# Altium PCB Receiver_1n5819.PcbDoc
Units mil, origin at the board's own origin, x right, y up, seen from the top; angles counter-clockwise.
Board outline 2355 x 1270 mil, 2 copper layers (Top Layer, Bottom Layer); 23 components, 11 nets, 53 pads, 0 vias.
Unrouted connection lines stored in the file: 1.
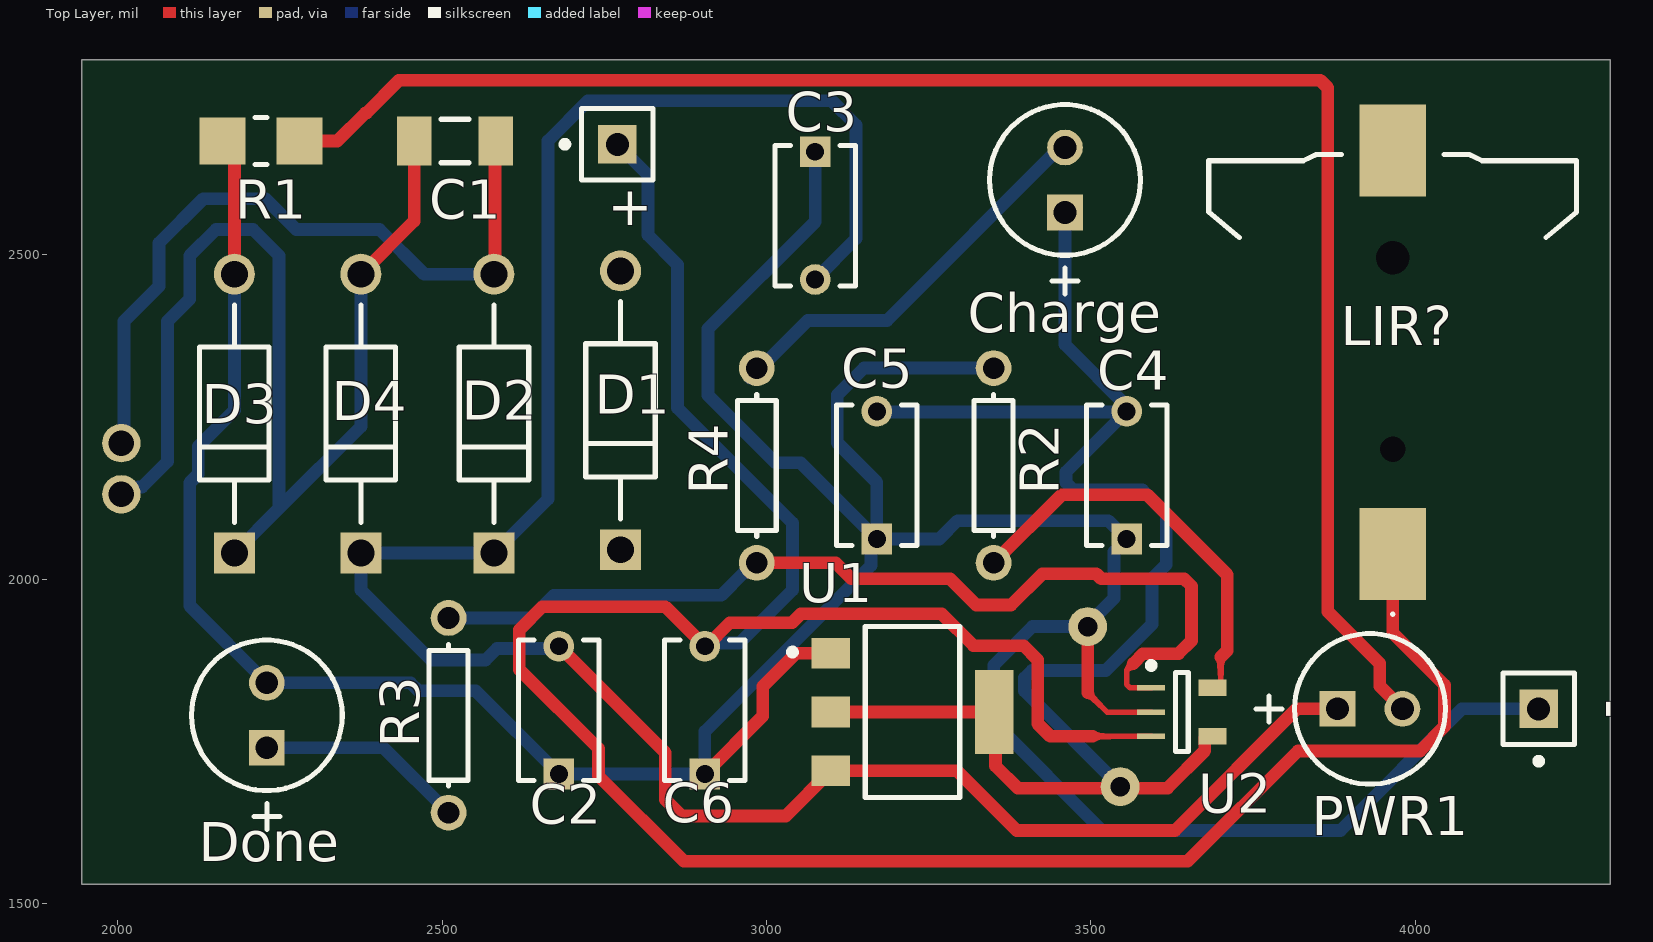
[diagram p0: Top Layer view]
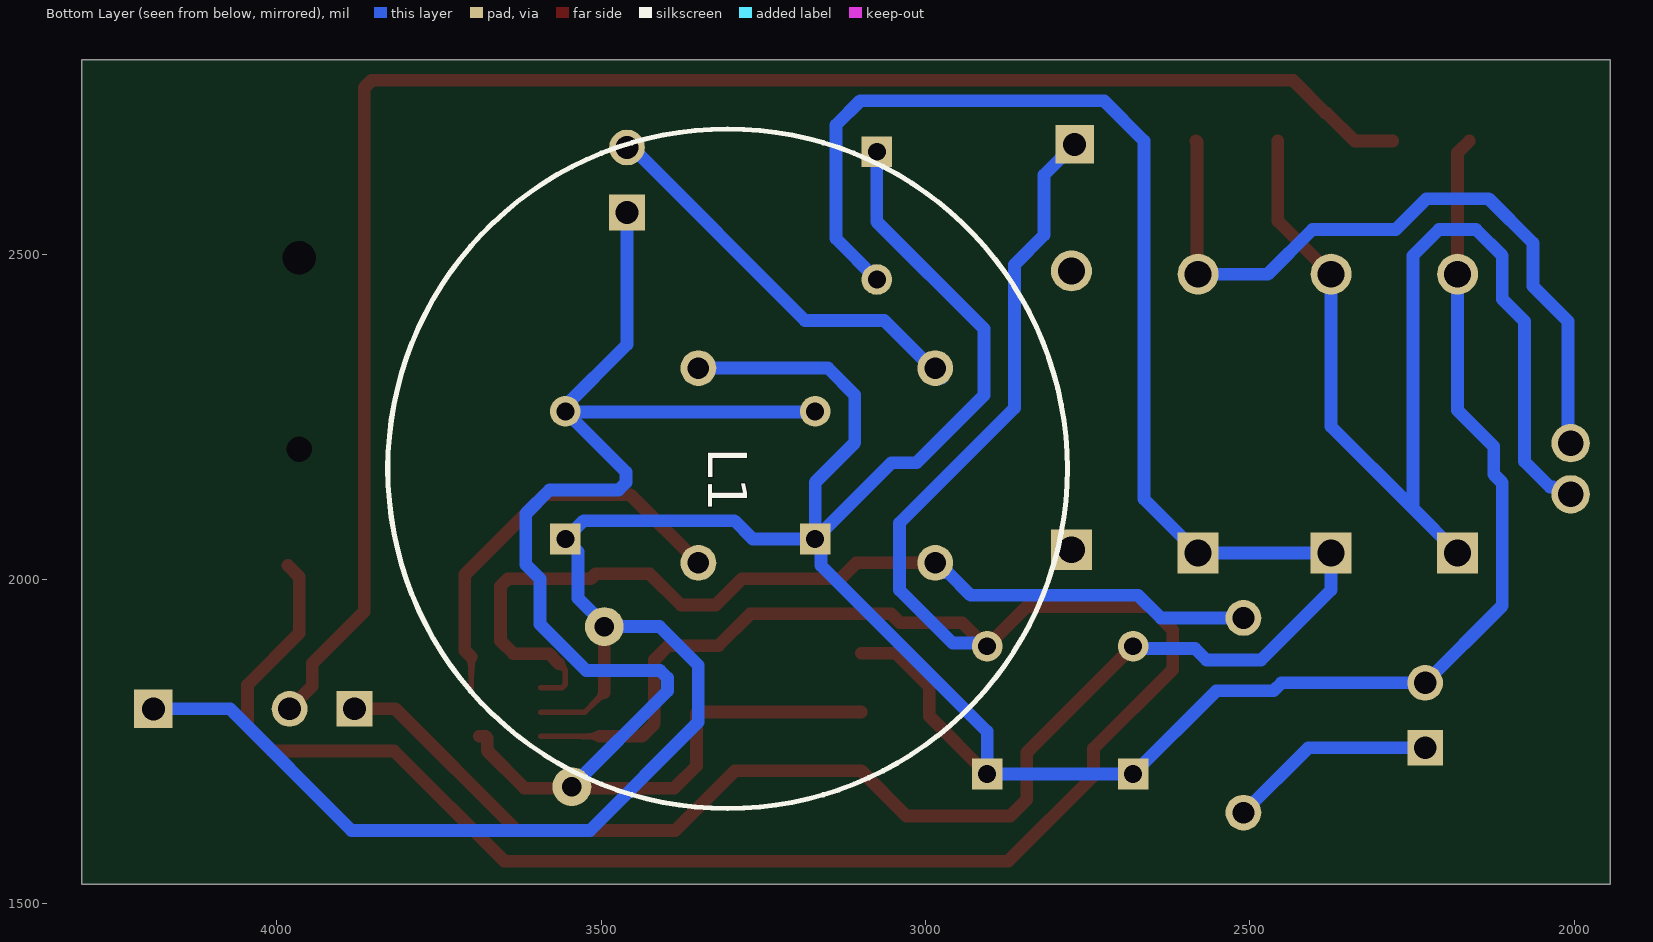
[diagram p1: Bottom Layer view, seen from below]
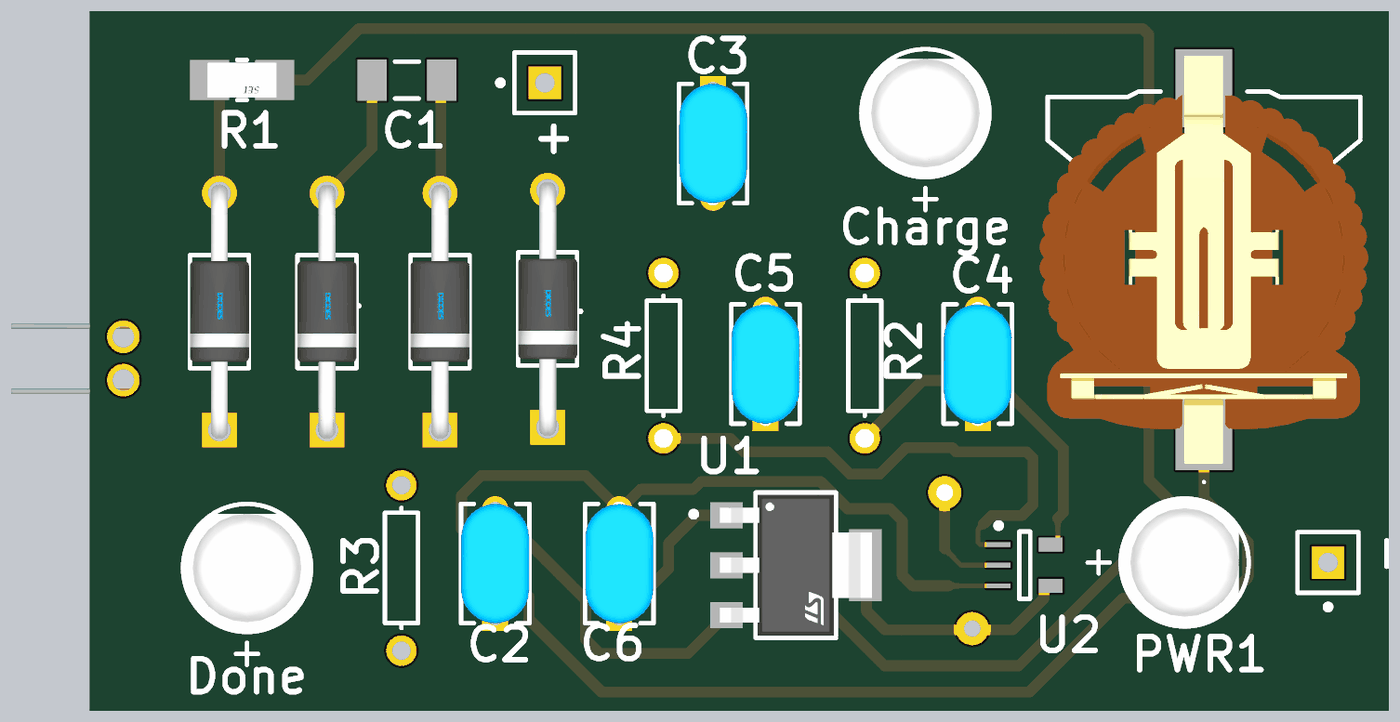
[diagram p2: 3D render of the assembled board from above, using the file's embedded part models]

## Layer stack, top to bottom
Top Solder: solder mask 0.4, Solder Resist, Dk 3.5
Top Layer: signal copper 1.4
Dielectric 1: dielectric 12.6, FR-4, Dk 4.8
Bottom Layer: signal copper 1.4
Bottom Solder: solder mask 0.4, Solder Resist, Dk 3.5

## Board outline
1945,1530 4300,1530 4300,2800 1945,2800

## Design rules (kind name [scope] priority, off if disabled: settings)
Clearance [All] p1: gap=27.56 ignorepadtopadclearanceinfootprint=FALSE
PolygonConnect [All] p1: connectstyle=Relief reliefconductorwidth=10 reliefentries=4 polygonreliefangle="90 Angle" airgapwidth=10
RoutingVias [All] p1: holewidth=28 width=50 viastyle="Through Hole" minholewidth=28 minwidth=50 maxholewidth=28 maxwidth=50
SolderMaskExpansion [All] p1: expansion=4 istentingtop=FALSE
SupplyNets "Schematic Supply Nets" [InNet('GND')] p1: voltage=0.000
Width [All] p1: maxlimit=19.68 minlimit=8.66 preferedwidth=19.68 bottomlayer_minwidth=19.68 minimp=50.000000 maximp=50.000000 favimp=50.000000
30 further rules are at their usual default settings.

## Components (designator, comment, footprint, x,y, rotation, side; value= is the part's Value field where it differs from the comment)
+ "Antenna" PIN1 2770,2670 r90 top
- "Antenna" PIN1 4190,1800 r180 top
C1 "330nF" CAPC1206(3216)170_M 2520,2675 r180 top value=6.8nF
C2 "10nF" FP-RDE2M1-MFG 2680,1797.99 r90 top
C3 "1uF" FP-RDE2M1-MFG 3075,2560 r270 top
C4 "4u7" FP-RDE2M1-MFG 3555,2160 r90 top
C5 "4u7" FP-RDE2M1-MFG 3170,2160 r90 top
C6 "10uF" FP-RDE2M1-MFG 2905,1797.99 r90 top
Charge "WP7113SGD" KING-WP7113SGD_V 3460,2615 r90 top
D1 "1N5819-T" FP-DO-41_Plastic-MFG 2775,2260 r90 top value="110 pF"
D2 "1N5819-T" FP-DO-41_Plastic-MFG 2580,2255 r90 top value="110 pF"
D3 "1N5819-T" FP-DO-41_Plastic-MFG 2180,2255 r90 top value="110 pF"
D4 "1N5819-T" FP-DO-41_Plastic-MFG 2375,2255 r90 top value="110 pF"
Done "WP7113SGD" KING-WP7113SGD_V 2230,1790 r90 top
L1 "760308101303" 760308101303 3305,2170 r270 bottom
LIR? "1056" 1056 3965,2349.33 r90 top
PWR1 "WP7113SGD" KING-WP7113SGD_V 3930,1800 r0 top
R1 "1K" FP-HCJ1206-MFG 2220.94,2675 r180 top
R2 "" AXIAL-0.3 3350,2175 r270 top value=51K
R3 "" AXIAL-0.3 2510,1790 r90 top value=1K
R4 "" AXIAL-0.3 2985,2175 r270 top value=1K
U1 "LDL1117S50R" FP-SOT-223-0046067_14-MFG 3225,1795 r0 top
U2 "MCP73831T-4ADI/OT" SOT-23-OT5_N 3640,1795 r0 top

## Footprints (in the part's own frame and the unit in brackets; to place one, negate y for a bottom-side part, rotate by r counter-clockwise, add the part's x,y. Pads: shape width x height; smd on the part's side, far side on the other; paste and mask are expansions set on the pad)
1056 [mm]
  round 0.5 hole 1 unplated: 1(-3.8,0)
  round 0.65 hole 1.3 unplated: 2(3.7,0)
  rect 3.6x2.6 smd: C1(-7.9,0) C2(7.9,0)
  silkscreen extent -10.3,-7.2 7.75,7.2, body extent -9.4,-7.57 9.4,7.57, height 4.32
760308101303 [mm] "Wireless Power Transfer Receiver Coil,  Dia 26mm"
  round 1.5 hole 1: 1(1,33) 2(-1,33)
  silkscreen extent -13.3,-13.3 13.3,13.3, body extent -13.15,-13.15 13.15,38.15, height 1.64
AXIAL-0.3 [mm] "Axial Device, Thru-Hole; 2 Leads; 0.3 in Pin Spacing"
  round 1.4 hole 0.85: 1(-3.81,0) 2(3.81,0)
  silkscreen extent -2.77,-0.76 2.77,0.76
CAPC1206(3216)170_M [mm] "Chip Capacitor, Body 3.2x1.6mm, Height 1.7mm, IPC Low Density"
  rect 1.35x1.9 smd: 1(-1.6,0) 2(1.6,0)
  silkscreen extent -0.55,-0.85 0.55,0.85, body extent -1.7,-0.9 1.7,0.9, height 1.7
FP-DO-41_Plastic-MFG [mm]
  rect 1.6x1.6 hole 1.05 paste-2539.97 mask+0: 1(-5.456,0)
  round 1.6 hole 1.05 paste-2539.97 mask+0: 2(5.456,0)
  silkscreen extent -4.26,-1.36 4.26,1.36, body extent -6.36,-1.46 6.36,1.46, height 0.25
FP-HCJ1206-MFG [mm]
  rect 1.8x1.84 smd paste+0 mask+0: 1(-1.5,0) 2(1.5,0)
  silkscreen extent -0.23,-0.92 0.23,0.92, body extent -2.5,-1.02 2.5,1.02, height 0.25
FP-RDE2M1-MFG [mm]
  rect 1.2x1.2 hole 0.7 paste-2539.97 mask+0: 1(-2.5,0)
  round 1.2 hole 0.7 paste-2539.97 mask+0: 2(2.5,0)
  silkscreen extent -2.75,-1.58 2.75,1.58, body extent -3.2,-1.68 3.2,1.68, height 0.25
FP-SOT-223-0046067_14-MFG [mm]
  rect 1.5x1.2 smd paste+0 mask+0: 1(-3.2,2.3) 2(-3.2,0) 3(-3.2,-2.3)
  rect 1.5x3.3 smd paste+0 mask+0: 4(3.2,0)
  silkscreen extent -4.82,-3.35 1.85,3.35, body extent -4.05,-3.45 4.05,3.45, height 0.25
KING-WP7113SGD_V [mm] "THD, 2-Leads, Dia 5.9mm, Body Length 8.6mm"
  rect 1.4x1.4 hole 0.889: 1(-1.27,0)
  round 1.4 hole 0.889: 2(1.27,0)
  silkscreen extent -4.47,-2.95 2.95,2.95, body extent -2.95,-2.95 2.5,2.95, height 15.5
PIN1 [mm] "Generic Antenna; 1 Lead"
  rect 1.5x1.5 hole 0.9: 1(0,0)
  silkscreen extent -1.4,-1.4 1.4,2.17
SOT-23-OT5_N [mm] "SOT23, 5-Leads, Body 2.9x1.7mm, Pitch 0.95mm, Lead Span 2.8mm, IPC Medium Density"
  rect 1.1x0.22 smd: 1(-1.2,0.95) 2(-1.2,0) 3(-1.2,-0.95)
  rect 1.1x0.65 smd: 4(1.2,-0.95)
  rect 1.1x0.635 smd: 5(1.2,0.95)
  silkscreen extent -1.32,-1.55 0.25,1.95, body extent -0.9,-1.55 0.9,1.55, height 1.45

## Part data
+ -: "Generic Antenna", LatestRevisionDate=17-Jul-2002, LatestRevisionNote="Re-released for DXP Platform.", PackageReference=PIN1, Published=24-Mar-1999, Publisher="Altium Limited"
C1: library part CMP-1037-03299-1, "CAP 6.8nF 50V ±10% 1206 (3216 Metric) Thickness 1.7mm SMD", Case-EIA=1206, Case-Metric=3216, Rated Voltage="50 V", Tolerance=Â±10%, Max Thickness="1.7 mm", Technology=SMT
C2: library part CMP-06035-028300-1, "Ceramic Capacitor 10nF ±10% 630V X7R Radial", Case/Package=Radial, Dielectric=X7R, Max Operating Temperature=125°C, Min Operating Temperature=-55°C, Package Quantity=2000, Resistor Type=Ceramic, Tolerance=10%, Voltage Rating=630V, Capacitance=10nF, Height=4mm, Height - Seated (Max)=0.236inch, Lead Diameter=0.5mm, Lead Free="Lead Free", Lead Pitch=0.197inch, Lead/Base Style="Formed Leads", Length=0.217inch, Mount="Through Hole", Packaging="Tape and Reel", Termination=Radial, Voltage Rating (DC)=630V, Width=4mm
C3 C4 C5 C6: library part CMP-06035-028300-1, "Ceramic Capacitor 10nF ±10% 630V X7R Radial", Capacitance=10nF, Case/Package=Radial, Dielectric=X7R, Max Operating Temperature=125°C, Min Operating Temperature=-55°C, Package Quantity=2000, Resistor Type=Ceramic, Tolerance=10%, Voltage Rating=630V, Height=4mm, Height - Seated (Max)=0.236inch, Lead Diameter=0.5mm, Lead Free="Lead Free", Lead Pitch=0.197inch, Lead/Base Style="Formed Leads", Length=0.217inch, Mount="Through Hole", Packaging="Tape and Reel", Termination=Radial, Voltage Rating (DC)=630V, Width=4mm
Charge Done PWR1: library part CMP-2100-03698-1, "LED Green, 62.5 mW, 25 mA, -40 to 85 degC, 2-Pin THD, RoHS, Bulk", Case/Package=Radial, Colour=Green, Forward Voltage=2.2V, Manufacturer=Kingbright, Package Description="2-Pin Through Hole Device, Dia 5.9 mm, Body Length 8.6 mm", Package Quantity=1000, Test Current=20mA, Datasheet URL=http://www.kingbrightusa.com/images/catalog/SPEC/WP7113SGD.pdf, Datasheet Version="Rev. 6B, 01/2015", Dominant Wavelength=568nm, Height=8.6mm, Illumination Colour=Green, Lead Free=LeadFree, Lens Style=Tinted, Luminous Intensity=40mcd, Package Reference=WP7113SGD, Packaging=Bulk, RoHSCompliant=true, Viewing Angle=30degrees, Wavelength=568nm
D1 D2 D3 D4: library part CMP-12790-000042-1, "DIODE SCHOTTKY 40V 1A DO41", Capacitance="110 pF", Forward Current=1A, Manufacturer="Diodes Inc.", Max Junction Temp=+125°C, Max Repetitive Reverse Voltage=40V, Max Surge Forward Current=25A, Package="DO-41 (Plastic)", Peak Reverse Current=1mA, Temperature="-65°C to +125°C", Temperature Range Low=-65°C, Automotive=No, Category=Diode, ComponentLink2Description=Datasheet, ComponentLink2URL=https://www.diodes.com/assets/Datasheets/ds23001.pdf, Device Class L1="Discrete Semiconductors", Device Class L2=Diodes, Device Class L3="Schottky Diodes", Digikey Description="DIODE SCHOTTKY 40V 1A DO41", Footprint Url=https://www.diodes.com/assets/Package-Files/DO-41-Plastic.pdf, Height=2.72mm, Ipc Land Pattern Name=DIOPA1091W105L521D272, Lead Free=Yes, Manufacturer Part Number=1N5819-T, Mouser Description="Schottky Diodes & Rectifiers Vr/40V Io/1A T/R", Octopart=https://octopart.com/1n5819-t-diodes+inc.-55389586, Reverse Voltage=40V, RoHS=TRUE, Temperature Range High=+125°C
L1: library part CMP-03913-52738428-3, "WE-WPCC Wireless Power Charging Coil", Current Rating=1.5A, DC Resistance (DCR)=460mΩ, Inductance=47µH, Inductance Tolerance=10%, Max Operating Temperature=105°C, Min Operating Temperature=-20°C, Resistance=500mΩ, Saturation Current=3A, Self Resonant Frequency=8MHz, Diameter=26.3mm, Height=1.3mm, Length=25mm, Logic Function=Receiver, Number of Pins=2, Q Factor=25, REACH SVHC=Unknown, RoHS=Compliant, Tolerance=10%, Width=25mm
LIR?: "Hardware", Manufacturer_Name="Keystone Electronics", Mouser Part Number=534-1056, Datasheet Link=https://www.keyelco.com/product.cfm/product_id/715, Height=4.24mm, Manufacturer_Part_Number=1056, Mouser Price/Stock=https://www.mouser.co.uk/ProductDetail/Keystone-Electronics/1056?qs=sZfk%252BfAlGe4w00bCJntjFg%3D%3D
R1: library part CMP-26527-002752-1, "RES 0 OHM JUMPER 3/4W 1206", Case Code (Imperial)=1206, Case Code (Metric)=3216, Max Operating Temperature=155°C, Min Operating Temperature=-55°C, Package Quantity=5000, Resistance=0mR, Case/Package=1206, Features="Automotive AEC-Q200", Height=0.026inch, Length=0.122inch, Mount="Surface Mount", Number of Terminations=2, Packaging="Tape and Reel", Radiation Hardening=No, RoHS Compliant=Yes, Termination=Wraparound, Width=0.061inch
R2 R3 R4: library part Res1, "Resistor", LatestRevisionDate=17-Jul-2002, LatestRevisionNote="Re-released for DXP Platform.", PackageDescription="Axial Device, Thru-Hole; 2 Leads; 0.3 in Pin Spacing", PackageReference=AXIAL-0.3, Published=8-Jun-2000, Publisher="Altium Limited"
U1: library part CMP-12153-000005-1, "IC REG LINEAR 5V 1.2A SOT223", Dropout Voltage=350mV, Manufacturer=STMicroelectronics, Max Junction Temp=+150°C, Max Supply Voltage=18V, Min Supply Voltage=2.6V, Nominal Supply Current=250uA, Output Current=2A, Output Voltage=5V, Package=SOT-223-0046067_14, Temperature="-40°C to +125°C", Temperature Range High=+125°C, Temperature Range Low=-40°C, Accuracy Percentage=2%, Automotive=No, Category=IC, ComponentLink2Description=Datasheet, ComponentLink2URL=https://www.st.com/content/ccc/resource/technical/document/datasheet/group3/0e/5a/00/ca/10/1a/4f/a5/DM00366442/files/DM00366442.pdf/jcr:content/translations/en.DM00366442.pdf, Device Class L1="Integrated Circuits (ICs)", Device Class L2="Power Management ICs", Device Class L3="Voltage Regulators - Linear", Digikey Description="IC REG LINEAR 5V 1.2A SOT223", Height=1.9mm, Lead Free=Yes, Manufacturer Part Number=LDL1117S50R, Mouser Description="LDL1117 Series 1.2 A 5 V High PSRR LDO Linear Voltage Regulator - SOT-223", Number Of Outputs=1, Octopart=https://octopart.com/ldl1117s50r-stmicroelectronics-81876164, Output Type=Fixed, RoHS=TRUE, Standoff Height=0.02mm
U2: library part CMP-0133-00137-1, "Miniature Single-Cell, Fully Integrated Li-Ion, Li-Polymer Charge Management Controller, 4.4V, 5-Pin SOT-23, Industrial Temperature, Tape and Reel", Code_IPC=SOT23-5, DatasheetVersion="revE, Sep-2008", PackageDescription="5-Lead Plastic Small Outline Transistor (OT) [SOT-23]", PackageReference=SOT-23-OT5, PackageVersion="revBB, Aug-2009"

## Free pads (board coordinates)
  round 60 hole 30: 2(3545,1680) 4(3495,1926.66)

## Nets (pads, with @x,y where several pads share a name; then routed paths per layer and width w, separated by ;. In a path a pad name is that pad's centre, name@x,y a point inside that pad or via, vN(x,y) a via of type N, cw(c..) or ccw(c..) an arc to the next point about the centre after c; other vN are vias at no path point)
GND: -.1 C2.1 C3.1 C4.1 C5.1 C6.1 D3.2 Done.2 LIR?.C2 pad.4 R1.2 R2.1 U1.1 U2.2 | length 5747.5
  Top Layer w8.66: 3495,1825 3525,1795 U2.2
  Top Layer w19.68: R1.2 2180,2656.89 D3.2 ; C6.1 2994.26,1788.83 2994.26,1834.26 3045.55,1885.55 U1.1 ; 3495,1825 pad.4
  Bottom Layer w19.68: D3.2 2180,2260.1 2124.17,2204.27 2124.17,2161.45 2111.1,2148.38 2111.1,1958.9 Done.2 2451.32,1840 2463.52,1827.8 2551.77,1827.8 C2.1 C6.1 2905,1765 3160.97,2020.97 3160.97,2052.55 C5.1 ; C3.1 3075,2550.66 2910.04,2385.7 2910.04,2283.09 3013.91,2179.22 3052.35,2179.22 C5.1 ; R2.1 3150.27,2325 3108.98,2283.7 3108.98,2210.04 3170,2149.02 C5.1 ; -.1 4071.87,1800 3884.47,1612.6 3517.08,1612.6 3350.35,1779.33 3350.35,1867.3 3409.72,1926.66 pad.4 3495,1929.94 3535.45,1970.39 3535.45,2042.03 C4.1 3526.61,2089.96 3294.54,2089.96 3266.15,2061.57 C5.1
Net+_1: +.1 C6.2 LIR?.C1 U2.3 | length 4148.6
  Top Layer w8.66: 3502.21,1757.6 U2.3
  Top Layer w19.68: 3502.21,1757.6 3437.21,1757.6 3417.91,1776.89 3417.91,1875.45 3396,1897.36 3318.96,1897.36 3269.74,1946.57 3053.33,1946.57 3039.55,1932.8 2943.79,1932.8 2907.41,1896.42 C6.2 2843.98,1957.44 2654.72,1957.44 2618.98,1921.69 2618.98,1860.73 2741.02,1738.68 2741.02,1696.59 2872.62,1565 3648.8,1565 3818.84,1735.04 4006.91,1735.04 4044.96,1773.09 4044.96,1836.85 3965,1916.81 3965,2003.22 LIR?.C1@3982.53,2020.75
  Bottom Layer w19.68: +.1 2817.24,2622.76 2817.24,2530 2862.8,2484.45 2862.8,2263.52 3039.96,2086.36 3039.96,1983.09 2958.15,1901.28 2909.86,1901.28 C6.2
NetC1_1: C1.1 D2.2 L1.2 | length 1130.3
  Top Layer w19.68: D2.2 2581.5,2471.31 2581.5,2673.5 C1.1
  Bottom Layer w19.68: L1.2@2010,2208.74 2010,2397.25 2063.86,2451.11 2063.86,2517.92 2131.89,2585.95 2228.11,2585.95 2275.35,2538.71 2403.54,2538.71 2472.44,2469.81 D2.2
NetC1_2: C1.2 D3.1 D4.2 L1.1 | length 1729.6
  Top Layer w19.68: D4.2 2457.01,2551.82 C1.2
  Bottom Layer w19.68: L1.1@2010,2130 2020.65,2130 2032.46,2141.81 2037.72,2141.81 2076.93,2181.02 2076.93,2397.36 2111.1,2431.54 2111.1,2498.35 2151.46,2538.71 2208.54,2538.71 2248.9,2498.35 2248.9,2109.09 ; D3.1 2248.9,2109.09 ; D4.2 2375,2235.19 2248.9,2109.09
NetC2_2: C2.2 C3.2 D2.1 D4.1 PWR1.1 U1.3 | length 3564.9
  Top Layer w19.68: C2.2 2843.98,1732.44 2843.98,1660.45 2869.43,1635 3029.57,1635 U1.3 3293.74,1704.45 3385.59,1612.6 3629.59,1612.6 3816.99,1800 PWR1.1
  Bottom Layer w19.68: C2.2 2676.34,1892.76 2584.85,1892.76 2567.13,1875.04 2483.09,1875.04 2375,1983.13 D4.1 D2.1 2663.32,2123.51 2663.32,2675.27 2724.98,2736.93 3100.57,2736.93 3137.99,2699.51 3137.99,2524.57 C3.2
NetC4_2: C4.2 C5.2 Charge.1 pad.2 U1.2 U1.4 U2.4 | length 2418.1
  Top Layer w19.68: U1.2 U1.4 3352.96,1793.03 3352.96,1712.04 3387.24,1677.76 3545,1677.76 3617.76,1677.76 3675.43,1735.43 3675.43,1754.64 3678.39,1757.6 U2.4
  Bottom Layer w19.68: C5.2 3171,2257.42 C4.2@3554,2257.42 ; Charge.1 3460,2361.42 C4.2@3559,2262.42 ; pad.2 3397.6,1827.4 3397.6,1847.73 3409.13,1859.26 3522.92,1859.26 3594.11,1930.45 3594.11,2000.55 3616.02,2022.46 3616.02,2100.69 3579.51,2137.2 3473.15,2137.2 3461.62,2148.74 3461.62,2165.04 C4.2@3554,2257.42 ; C4.2 C4.2@3554,2257.42
NetCharge_2: Charge.2 R4.1 | length 632
  Bottom Layer w19.68: R4.1@2975,2310 3063.58,2398.58 3185.57,2398.58 3451.99,2665 Charge.2
NetDone_1: Done.1 R3.1 | length 321.4
  Bottom Layer w19.68: Done.1 2410,1740 R3.1
NetPWR1_2: PWR1.2 R1.1 | length 2633.3
  Top Layer w19.68: R1.1 2338.59,2675 2381.89,2718.3 2383.44,2718.3 2433.76,2768.62 3853.47,2768.62 3865,2757.09 3865,1950 3944.96,1870.04 3944.96,1835.04 PWR1.2
NetR2_2: R2.2 U2.5 | length 633
  Top Layer w8.66: U2.5@3700,1832.38 3700,1880
  Top Layer w19.68: R2.2 3455,2130 3586.71,2130 3710,2006.71 3710,1890 3700,1880
NetR3_2: R3.2 R4.2 U2.1 | length 1499.6
  Top Layer w8.66: 3565.32,1870 3555,1859.68 3555,1837.48 3560.07,1832.4 U2.1
  Top Layer w19.68: R4.2@2975,2010 2984.59,2010 2999.59,2025 3106.44,2025 3130.89,2000.55 3282.58,2000.55 3323.09,1960.04 3376.91,1960.04 3425.09,2008.22 3508.21,2008.22 3515.89,2000.55 3643.47,2000.55 3655,1989.02 3655,1905.32 ; 3565.32,1870 3580.32,1885 3635,1885 3655,1905
  Bottom Layer w19.68: R3.2 2637.28,1940 2672.28,1975 2930.41,1975 2965.41,2010 R4.2@2975,2010
pads on no net: D1.1 D1.2 LIR?.1 LIR?.2

## Text inside footprints (layer, text, board x,y; h text height)
L1: Assembly Notes "Pitch 2mm min." at 2123.9,2445.59 h48 r90